# EAGLE board EducaIno-PcbV1.1 (EAGLE 7.6.0)
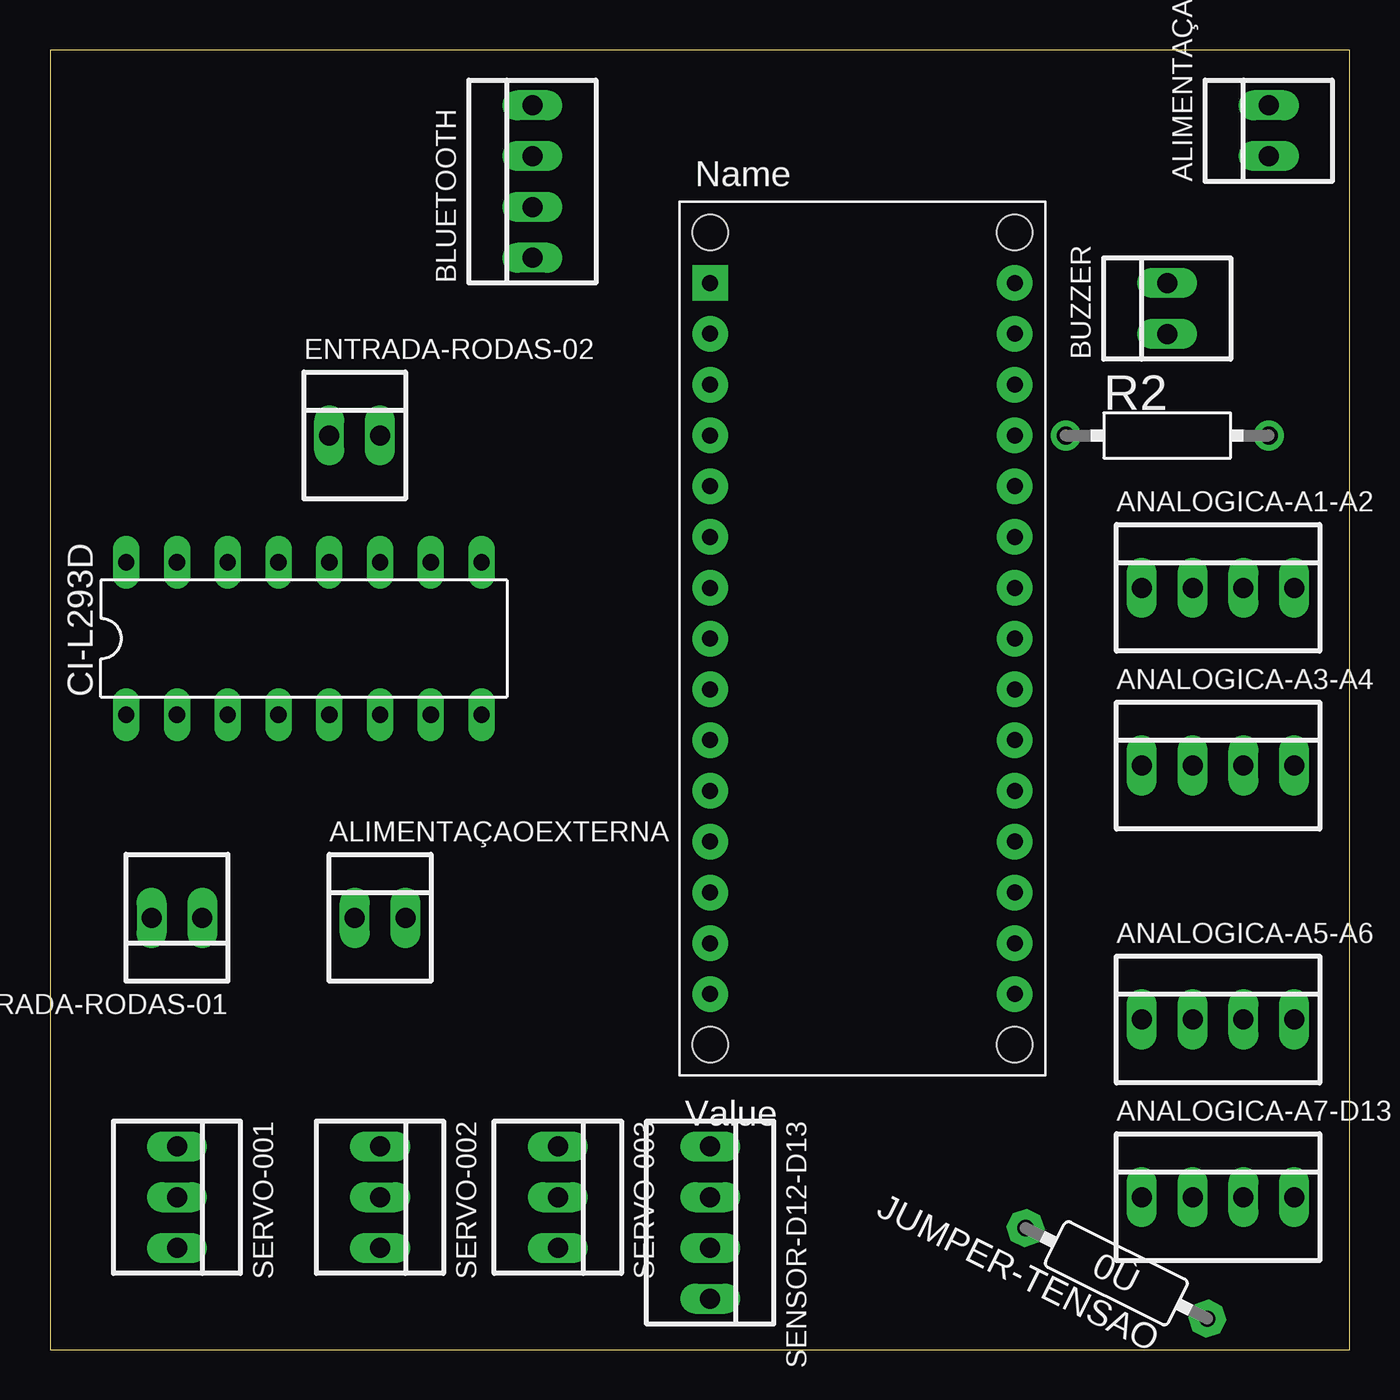
[diagram p0: board, top side]
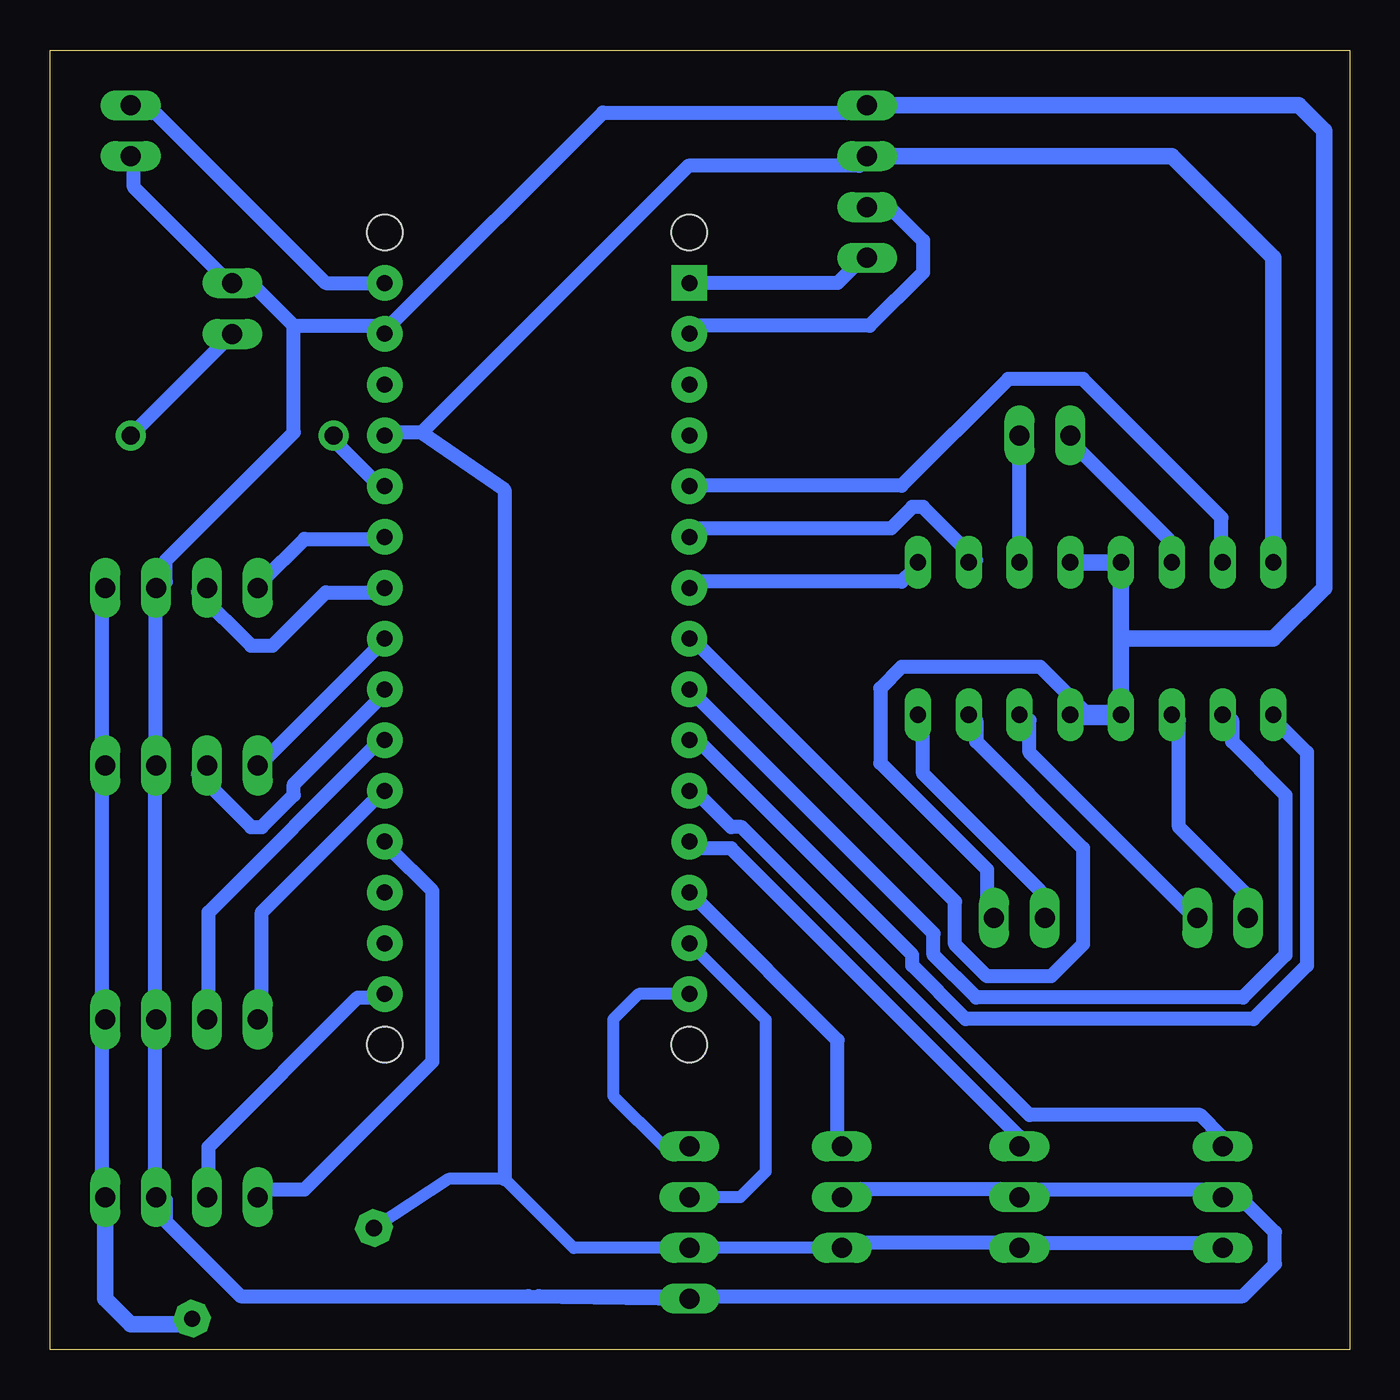
[diagram p1: board, bottom side, seen from below]

Size 65 x 65 mm. Coordinates in mm from the lower left corner, seen from the top.
Outline: 0,0 65,0 65,65 0,65 0,0
Copper layers (1*16): Top 0.035mm / dielectric 1.5mm / Bottom 0.035mm
Design rules "default *": minimum track width 28mil, minimum drill 24mil, track to track 14mil, track to pad 8mil, pad to pad 8mil, via to via 8mil, smd to smd 8mil, copper to edge 40mil, drill to drill 8mil, minimum pad ring 10mil, minimum via ring 28mil, stop-mask expansion 4mil, vias tented up to drill 0mil, thermal gap 10mil

## Footprints (pad centres in the part's own frame; a part is rotated, then mirrored left to right if it is on the bottom)
22-23-2021 = drill 1 long: 1 -1.27,0; 2 1.27,0
22-23-2041 = drill 1 long: 1 -3.81,0; 2 -1.27,0; 3 1.27,0; 4 3.81,0
DIL16 = drill 0.813 long: 1 -8.89,-3.81; 2 -6.35,-3.81; 3 -3.81,-3.81; 4 -1.27,-3.81; 5 1.27,-3.81; 6 3.81,-3.81; 7 6.35,-3.81; 8 8.89,-3.81; 9 8.89,3.81; 10 6.35,3.81; 11 3.81,3.81; 12 1.27,3.81; 13 -1.27,3.81; 14 -3.81,3.81; 15 -6.35,3.81; 16 -8.89,3.81
0R/10E = drill 0.813 pad 1.778 octagon: 1 -5.08,0; 2 5.08,0
HPS58 = drill 0.9 pad 1.5: 1 -5.08,0; 2 5.08,0
22-23-2031 = drill 1 long: 1 -2.54,0; 2 0,0; 3 2.54,0
PDIP-32 = drill 0.8 pad 1.778: 3V3 15.24,-35.56; +5V 15.24,-10.16; A0 15.24,-12.7; A1 15.24,-15.24; A2 15.24,-17.78; A3 15.24,-20.32; A4 15.24,-22.86; A5 15.24,-25.4; A6 15.24,-27.94; A7 15.24,-30.48; AREF 15.24,-33.02; D0/RX 0,-5.08; D2 0,-12.7; D3 0,-15.24; D4 0,-17.78; D5 0,-20.32; D6 0,-22.86; D7 0,-25.4; D8 0,-27.94; D9 0,-30.48; D10 0,-33.02; D11 0,-35.56; D12 0,-38.1; D13 15.24,-38.1; GND 0,-10.16; GND1 15.24,-5.08; RESET 0,-7.62; RESET1 15.24,-7.62; VIN 15.24,-2.54 | drill 0.8 pad 1.778 square: D1/TX 0,-2.54 | hole 1.778: 0,0; 0,-40.64; 15.24,-40.64; 15.24,0

## Placement (x,y rotation side)
ALIMENTAÇAO-ARDUINO  22-23-2021  [22-23-2021]  60.96,60.96 90 top
ALIMENTAÇAOEXTERNA  22-23-2021  [22-23-2021]  16.51,21.59 0 top
ANALOGICA-A1-A2  22-23-2041  [22-23-2041]  58.42,38.1 0 top
ANALOGICA-A3-A4  22-23-2041  [22-23-2041]  58.42,29.21 0 top
ANALOGICA-A5-A6  22-23-2041  [22-23-2041]  58.42,16.51 0 top
ANALOGICA-A7-D13  22-23-2041  [22-23-2041]  58.42,7.62 0 top
BLUETOOTH  22-23-2041  [22-23-2041]  24.13,58.42 90 top
BUZZER  22-23-2021  [22-23-2021]  55.88,52.07 90 top
CI-L293D  L293D  [DIL16]  12.7,35.56 0 top
ENTRADA-RODAS-01  22-23-2021  [22-23-2021]  6.35,21.59 180 top
ENTRADA-RODAS-02  22-23-2021  [22-23-2021]  15.24,45.72 0 top
JUMPER-TENSAO  [0R/10E]  53.34,3.81 153.5 top
R2  [HPS58]  55.88,45.72 0 top
SENSOR-D12-D13  22-23-2041  [22-23-2041]  33.02,6.35 270 top
SERVO-001  22-23-2031  [22-23-2031]  6.35,7.62 270 top
SERVO-002  22-23-2031  [22-23-2031]  16.51,7.62 270 top
SERVO-003  22-23-2031  [22-23-2031]  25.4,7.62 270 top
U$1  ARDUINONANO  [PDIP-32]  33.02,55.88 0 top

## Library data of the parts
ALIMENTAÇAO-ARDUINO ALIMENTAÇAOEXTERNA BUZZER ENTRADA-RODAS-01 ENTRADA-RODAS-02 = con-molex; MF: MOLEX; MPN: 22-23-2021; OC_FARNELL: 1462926; OC_NEWARK: 25C3832
ANALOGICA-A1-A2 ANALOGICA-A3-A4 ANALOGICA-A5-A6 ANALOGICA-A7-D13 BLUETOOTH SENSOR-D12-D13 = con-molex; MF: MOLEX; MPN: 22-23-2041; OC_FARNELL: 1462920; OC_NEWARK: 38C0355
CI-L293D = st-microelectronics; MPN: L293D; OC_FARNELL: 9589619; OC_NEWARK: 56P8249
JUMPER-TENSAO = jumper
R2 = resistor-power; OC_FARNELL: unknown; OC_NEWARK: unknown
SERVO-001-SERVO-003 = con-molex; MF: MOLEX; MPN: 22-23-2031; OC_FARNELL: 1462950; OC_NEWARK: 30C0862
U$1 = jet-lib

## Nets
N$2: CI-L293D.1 U$1.D7
N$3: CI-L293D.3 ENTRADA-RODAS-01.2
N$4: ALIMENTAÇAO-ARDUINO.1 ALIMENTAÇAOEXTERNA.2 ANALOGICA-A1-A2.3 ANALOGICA-A3-A4.3 ANALOGICA-A5-A6.3 ANALOGICA-A7-D13.3 BLUETOOTH.4 BUZZER.2 CI-L293D.4 CI-L293D.5 CI-L293D.12 CI-L293D.13 SENSOR-D12-D13.4 SERVO-001.2 SERVO-002.2 SERVO-003.2 U$1.GND1
N$5: ALIMENTAÇAOEXTERNA.1 CI-L293D.8
N$6: CI-L293D.6 ENTRADA-RODAS-01.1
N$7: CI-L293D.14 ENTRADA-RODAS-02.1
N$8: CI-L293D.11 ENTRADA-RODAS-02.2
N$9: CI-L293D.2 U$1.D6
N$10: CI-L293D.7 U$1.D5
N$11: CI-L293D.15 U$1.D2
N$12: CI-L293D.10 U$1.D3
N$13: CI-L293D.9 U$1.D4
N$14: SERVO-001.1 U$1.D8
N$15: SERVO-002.1 U$1.D9
N$16: SERVO-003.1 U$1.D10
N$19: ALIMENTAÇAO-ARDUINO.2 U$1.VIN
N$20: BUZZER.1 R2.2
N$21: R2.1 U$1.A0
N$22: ANALOGICA-A1-A2.1 U$1.A1
N$23: ANALOGICA-A1-A2.2 U$1.A2
N$24: ANALOGICA-A3-A4.1 U$1.A3
N$25: ANALOGICA-A3-A4.2 U$1.A4
N$26: ANALOGICA-A5-A6.2 U$1.A5
N$27: ANALOGICA-A5-A6.1 U$1.A6
N$28: ANALOGICA-A7-D13.1 U$1.A7
N$29: ANALOGICA-A7-D13.2 U$1.D13
N$30: BLUETOOTH.1 U$1.D1/TX
N$31: BLUETOOTH.2 U$1.D0/RX
S$1: U$1.GND
S$2: ANALOGICA-A1-A2.4 ANALOGICA-A3-A4.4 ANALOGICA-A5-A6.4 ANALOGICA-A7-D13.4 JUMPER-TENSAO.1
S$3: SENSOR-D12-D13.2 U$1.D11
S$4: SENSOR-D12-D13.1 U$1.D12
SERVO-001: BLUETOOTH.3 CI-L293D.16 JUMPER-TENSAO.2 SENSOR-D12-D13.3 SERVO-001.3 SERVO-002.3 SERVO-003.3 U$1.+5V

## Tracks (layer width: path | path; a pad name or v marks a point on that pad's centre or on a via)
N$2
  Bottom 0.711: U$1.D7 32.54,30.4 21.87,19.74 21.87,19.2 19.2,16.54 4.8,16.54 2.13,19.2 2.13,29.87 3.73,31.47 CI-L293D.1
N$3
  Bottom 0.711: CI-L293D.3 8.53,31.47 8.53,26.14 5.33,22.94 5.33,21.87 ENTRADA-RODAS-01.2
N$4
  Bottom 0.711: 52.81,51.21 48.54,51.21 U$1.GND1 48.01,51.21 37.34,61.87 24.54,61.87 BLUETOOTH.4 | 52.81,51.21 54.94,53.34 BUZZER.2 56.01,53.34 60.81,58.14 60.81,59.21 ALIMENTAÇAO-ARDUINO.1 | SERVO-003.2 25.07,8 16.54,8 SERVO-002.2 16,8 6.4,8 SERVO-001.2 5.87,7.47 5.33,7.47 3.73,5.87 3.73,4.27 5.33,2.67 40.54,2.67 SENSOR-D12-D13.4 41.07,2.67 55.47,2.67 59.21,6.4 59.21,7.47 ANALOGICA-A7-D13.3 59.74,8 59.74,16 ANALOGICA-A5-A6.3 59.74,16.54 59.74,28.8 ANALOGICA-A3-A4.3 59.74,29.34 59.74,37.87 ANALOGICA-A1-A2.3 59.21,38.41 59.21,39.47 52.81,45.87 52.81,51.21 | 13.87,39.47 CI-L293D.12 | 13.34,32 13.87,32 CI-L293D.5 13.34,32 | 13.34,32 15.47,34.14 22.4,34.14 23.47,33.07 23.47,29.34 18.14,24 18.14,21.87 ALIMENTAÇAOEXTERNA.2
  Bottom 0.813: CI-L293D.12 CI-L293D.13 11.43,35.56 | CI-L293D.4 11.43,35.56 | BLUETOOTH.4 2.54,62.23 1.27,60.96 1.27,38.1 3.81,35.56 11.43,35.56
  Bottom 1.016: CI-L293D.4 CI-L293D.5
N$5
  Bottom 0.711: CI-L293D.8 21.34,31.47 21.34,28.8 15.47,22.94 15.47,21.87 ALIMENTAÇAOEXTERNA.1
N$6
  Bottom 0.711: CI-L293D.6 16,31.47 16,29.87 8,21.87 ENTRADA-RODAS-01.1
N$7
  Bottom 0.711: CI-L293D.14 9.07,39.47 9.07,40.54 13.87,45.34 ENTRADA-RODAS-02.1
N$8
  Bottom 0.711: CI-L293D.11 16.54,39.47 16.54,45.34 ENTRADA-RODAS-02.2
N$9
  Bottom 0.711: U$1.D6 20.8,20.8 20.8,19.74 18.67,17.6 5.33,17.6 3.2,19.74 3.2,27.74 5.87,30.4 5.87,31.47 CI-L293D.2
N$10
  Bottom 0.711: U$1.D5 32.54,35.2 19.74,22.4 19.74,20.27 18.14,18.67 14.94,18.67 13.34,20.27 13.34,25.07 18.67,30.4 18.67,31.47 CI-L293D.7
N$11
  Bottom 0.711: U$1.D2 32.54,43.2 22.4,43.2 17.07,48.54 13.34,48.54 6.4,41.6 6.4,39.47 CI-L293D.15
N$12
  Bottom 0.711: U$1.D3 32.54,41.07 22.94,41.07 21.87,42.14 21.34,42.14 18.67,39.47 CI-L293D.10
N$13
  Bottom 0.711: U$1.D4 32.54,38.41 22.4,38.41 21.87,38.94 CI-L293D.9
N$14
  Bottom 0.711: U$1.D8 32.54,27.74 30.94,26.14 30.4,26.14 16,11.73 7.47,11.73 6.4,10.67 SERVO-001.1
N$15
  Bottom 0.711: U$1.D9 32.54,25.07 30.94,25.07 16.54,10.67 SERVO-002.1
N$16
  Bottom 0.711: U$1.D10 32.54,22.4 25.6,15.47 25.6,10.67 SERVO-003.1
N$19
  Bottom 0.711: U$1.VIN 51.21,53.34 59.74,61.87 60.81,61.87 ALIMENTAÇAO-ARDUINO.2
N$20
  Bottom 0.711: BUZZER.1 R2.2
N$21
  Bottom 0.711: U$1.A0 48.54,43.2 50.67,45.34 R2.1
N$22
  Bottom 0.711: U$1.A1 48.54,40.54 52.27,40.54 54.41,38.41 ANALOGICA-A1-A2.1
N$23
  Bottom 0.711: U$1.A2 48.54,37.87 51.21,37.87 53.87,35.2 54.94,35.2 57.61,37.87 ANALOGICA-A1-A2.2
N$24
  Bottom 0.711: U$1.A3 48.54,35.2 54.41,29.34 ANALOGICA-A3-A4.1
N$25
  Bottom 0.711: U$1.A4 48.54,32.54 52.81,28.27 52.81,27.74 54.41,26.14 54.94,26.14 57.61,28.8 ANALOGICA-A3-A4.2
N$26
  Bottom 0.711: U$1.A5 48.54,30.4 57.07,21.87 57.07,16.54 ANALOGICA-A5-A6.2
N$27
  Bottom 0.711: U$1.A6 48.54,27.74 54.41,21.87 54.41,16.54 ANALOGICA-A5-A6.1
N$28
  Bottom 0.711: U$1.A7 48.01,25.07 45.87,22.94 45.87,14.4 52.27,8 54.41,8 ANALOGICA-A7-D13.1
N$29
  Bottom 0.711: U$1.D13 48.54,17.6 49.61,17.6 57.07,10.13 57.07,8 ANALOGICA-A7-D13.2
N$30
  Bottom 0.711: U$1.D1/TX 25.6,53.34 24.54,54.41 BLUETOOTH.1
N$31
  Bottom 0.711: U$1.D0/RX 32.54,51.21 24,51.21 21.34,53.87 21.34,55.47 22.94,57.07 24,57.07 BLUETOOTH.2
S$1
  Bottom 0.711: 32.54,45.87 U$1.GND
S$2
  Bottom 0.711: ANALOGICA-A1-A2.4 62.41,37.87 62.41,29.34 ANALOGICA-A3-A4.4 62.41,28.8 62.41,16.54 ANALOGICA-A5-A6.4 62.41,16 62.41,8 ANALOGICA-A7-D13.4
  Bottom 0.813: ANALOGICA-A7-D13.4 62.23,2.54 60.96,1.27 58.16,1.27 JUMPER-TENSAO.1
S$3
  Bottom 0.61: U$1.D11 29.21,16.51 29.21,8.89 30.48,7.62 SENSOR-D12-D13.2
S$4
  Bottom 0.61: U$1.D12 35.56,17.78 36.83,16.51 36.83,12.7 34.29,10.16 SENSOR-D12-D13.1
SERVO-001
  Bottom 0.61: SERVO-003.3 SENSOR-D12-D13.3 38.81,5.08 42.27,8.53 45.07,8.53 JUMPER-TENSAO.2
  Bottom 0.711: 46.41,45.87 48.01,45.87 U$1.+5V | 46.41,45.87 33.07,59.21 24.54,59.21 BLUETOOTH.3 | 42.27,8.53 42.27,43 46.41,45.87 | 25.6,5.33 SERVO-003.3 25.07,5.33 16.54,5.33 SERVO-002.3 16,5.33 6.4,5.33 SERVO-001.3
  Bottom 0.813: CI-L293D.16 3.81,54.61 8.89,59.69 BLUETOOTH.3